# EAGLE board fe1.1s_board (EAGLE 7.1.0)
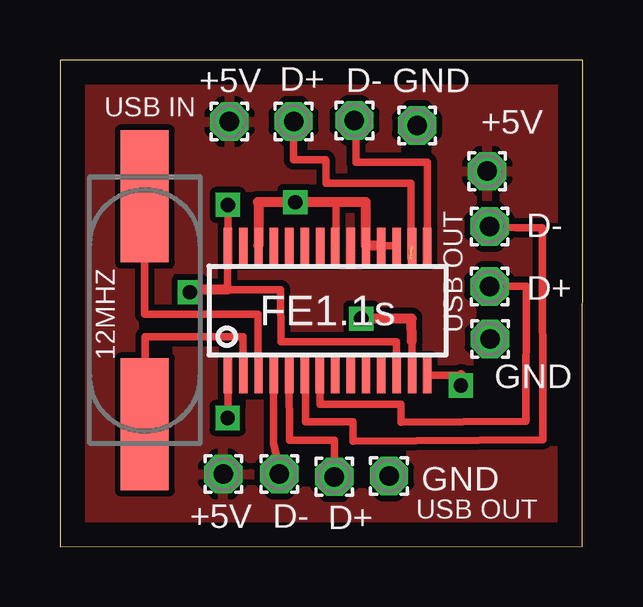
[diagram p0: board, top side]
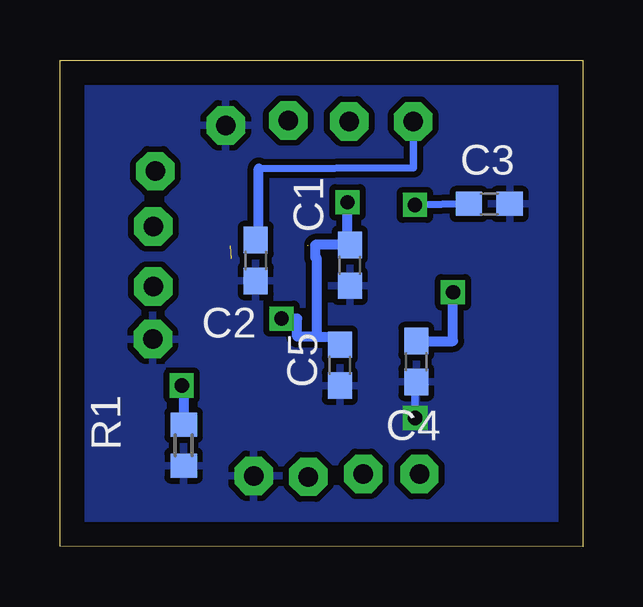
[diagram p1: board, bottom side, seen from below]

Size 21.8 x 20.28 mm. Coordinates in mm from the lower left corner, seen from the top.
Outline: 0,0 21.78,0.01 21.8,20.28 0,20.28 0,0
Copper layers (1*16): Top 0.035mm / dielectric 1.5mm / Bottom 0.035mm
Design rules "default": minimum track width 10mil, minimum drill 24mil, track to track 8mil, track to pad 8mil, pad to pad 8mil, via to via 8mil, smd to smd 8mil, copper to edge 40mil, drill to drill 8mil, minimum pad ring 10mil, minimum via ring 8mil, stop-mask expansion 4mil, vias tented up to drill 0mil, thermal gap 10mil
Net classes: 0 default: width 0.254 mm, drill 0.254 mm, clearance 0.254 mm

## Footprints (pad centres in the part's own frame; a part is rotated, then mirrored left to right if it is on the bottom)
CSM-7X-DU = smd 5.5 x 2: 1 -4.75,0; 2 4.75,0
C0603 = smd 1.1 x 1: 1 -0.85,0; 2 0.85,0
1,6/0,8 = drill 0.813 pad 1.6 octagon: 1 0,0
R0603 = smd 1 x 1.1: 1 -0.85,0; 2 0.85,0
FE1.1S_SSOP-28 = smd 0.35 x 1.5: 1 -4.16,-2.7; 2 -3.52,-2.7; 3 -2.88,-2.7; 4 -2.24,-2.7; 5 -1.6,-2.7; 6 -0.96,-2.7; 7 -0.32,-2.7; 8 0.32,-2.7; 9 0.96,-2.7; 10 1.6,-2.7; 11 2.24,-2.7; 12 2.88,-2.7; 13 3.52,-2.7; 14 4.16,-2.7; 15 4.16,2.7; 16 3.52,2.7; 17 2.88,2.7; 18 2.24,2.7; 19 1.6,2.7; 20 0.96,2.7; 21 0.32,2.7; 22 -0.3,2.7; 23 -0.96,2.7; 24 -1.6,2.7; 25 -2.24,2.7; 26 -2.88,2.7; 27 -3.52,2.7; 28 -4.16,2.7

## Placement (x,y rotation side)
12MHZ  CSM-7X-DU  [CSM-7X-DU]  3.54,9.85 270 top
C1  10uF  [C0603]  9.71,11.73 90 bottom
C2  10u  [C0603]  13.64,11.93 270 bottom
C3  10uF  [C0603]  3.9,14.29 180 bottom
C4  0.1u  [C0603]  6.94,7.71 90 bottom
C5  0.1u  [C0603]  10.13,7.57 90 bottom
I+5V  +5V  [1,6/0,8]  7.07,17.71 0 top
ID+  [1,6/0,8]  9.74,17.72 0 top
ID-  [1,6/0,8]  12.28,17.76 0 top
IGND  [1,6/0,8]  14.89,17.55 0 top
O3+5V  [1,6/0,8]  17.82,15.64 180 top
O3D+  [1,6/0,8]  17.91,10.84 0 top
O3D-  [1,6/0,8]  17.91,13.34 0 top
O3GND  [1,6/0,8]  17.93,8.66 0 top
O4+5V  [1,6/0,8]  6.81,3.03 0 top
O4D+  [1,6/0,8]  11.44,2.92 0 top
O4D-  [1,6/0,8]  9.15,3.04 0 top
O4GND  [1,6/0,8]  13.72,2.96 0 top
R1  2.7K  [R0603]  16.64,4.22 90 bottom
U$1  FE1.1S  [FE1.1S_SSOP-28]  11.16,9.85 0 top

## Library data of the parts
12MHZ = crystal; OC_FARNELL: unknown; OC_NEWARK: unknown
C1-C5 = rcl
I+5V ID+ ID- IGND O3+5V O3D+ O3D- O3GND O4+5V O4D+ O4D- O4GND = wirepad
R1 = resistor
U$1 = imcom

## Nets
+5V: C2.1 I+5V.1 O3+5V.1 O4+5V.1 U$1.20
GND: C1.1 C2.2 C3.1 C4.1 C5.1 IGND.1 O3GND.1 O4GND.1 R1.1 U$1.1
N$1: 12MHZ.2 U$1.2
N$2: 12MHZ.1 U$1.3
N$3: O4D-.1 U$1.4
N$4: O4D+.1 U$1.5
N$5: O3D+.1 U$1.7
N$6: O3D-.1 U$1.6
N$7: R1.2 U$1.14
N$8: ID-.1 U$1.15
N$9: ID+.1 U$1.16
N$11: C3.2 C4.2 U$1.12 U$1.28
N$12: C1.2 C5.2 U$1.13 U$1.17 U$1.18 U$1.19 U$1.21 U$1.26

## Tracks (layer width: path | path; a pad name or v marks a point on that pad's centre or on a via)
+5V
  Bottom 0.305: 13.51,15.75 7.1,15.79 7.07,15.79 I+5V.1
  Bottom 0.406: C2.1 13.51,12.78 13.51,15.75
  pour Top: -11.99,26.43 33.06,26.43 33.06,-3.39 -12.19,-3.59
GND  (via drill 0.6)
  Top 0.305: v6.99,5.37 v7,5.37 U$1.1
  Bottom 0.305: C4.1 6.99,6.87 v6.99,5.37
  pour Bottom: -11.19,24.57 -11.63,-3.48 32.85,-3.48 32.75,24.73
N$1
  Top 0.305: 12MHZ.2 3.56,5.1 3.56,8.75 7.64,8.75 U$1.2
N$2
  Top 0.305: U$1.3 8.27,9.69 3.54,9.69 12MHZ.1
N$3
  Top 0.305: U$1.4 8.9,7.14 8.9,4.32 9.12,3.43 O4D-.1
N$4
  Top 0.305: U$1.5 9.57,4.45 11.45,4.45 O4D+.1
N$5
  Top 0.305: U$1.7 10.84,5.95 14.21,5.95 14.21,5.2 19.43,5.22 19.44,10.86 18.25,10.86 O3D+.1
N$6
  Top 0.305: U$1.6 10.23,7.14 10.23,5.21 12.21,5.21 12.21,4.38 20.13,4.46 20.11,13.3 19.02,13.3 O3D-.1
N$7  (via drill 0.6)
  Top 0.305: U$1.14 16.72,7.14
  Top 0.406: 16.72,7.14 v16.72,6.71
  Bottom 0.406: v16.72,6.71 16.64,6.71 R1.2
N$8
  Top 0.305: ID-.1 12.35,17.76 12.35,16.03 15.32,16.03 U$1.15
N$9  (1 unrouted)
  Top 0.305: ID+.1 9.73,16.12 11.07,16.12 11.07,16.09 11.09,16.09 11.09,15.16 14.64,15.16 14.64,12
N$11  (via drill 0.6)
  Top 0.305: U$1.12 14.04,8.54 9.21,8.54 9.2,10.71 6.98,10.71 U$1.28 v7,14.25
  Top 0.406: 6.98,10.71 5.41,10.71 v5.41,10.61
  Bottom 0.305: v7,14.25 C3.2
  Bottom 0.406: C4.2 5.41,8.57 v5.41,10.61
N$12  (via drill 0.6)  (1 unrouted)
  Top 0.305: 11.46,12.55 11.5,12.55 11.5,14.36 | U$1.18 U$1.17 | U$1.13 14.67,8.57
  Top 0.406: 8.28,14.36 v9.81,14.36 11.5,14.36 12.76,14.36 U$1.19 U$1.18 | 8.26,14.36 8.28,14.36 | 8.28,14.36 U$1.26 | 14.67,8.57 14.66,9.51 v12.56,9.51
  Bottom 0.406: v9.81,14.36 9.81,12.57 C1.2 11.16,12.57 11.16,12.05 11.11,12.05 11.11,8.76 | 11.11,8.76 10.13,8.76 C5.2 | 11.11,8.76 11.91,8.76 11.91,9.51 v12.56,9.51

## Text on the board
tNames: +5V | D+ | D- | GND | USB IN | +5V | USB OUT | D- | D+ | GND | GND | USB OUT | +5V | D- | D+